# EAGLE board arduino KRI2020 (EAGLE 9.6.2)
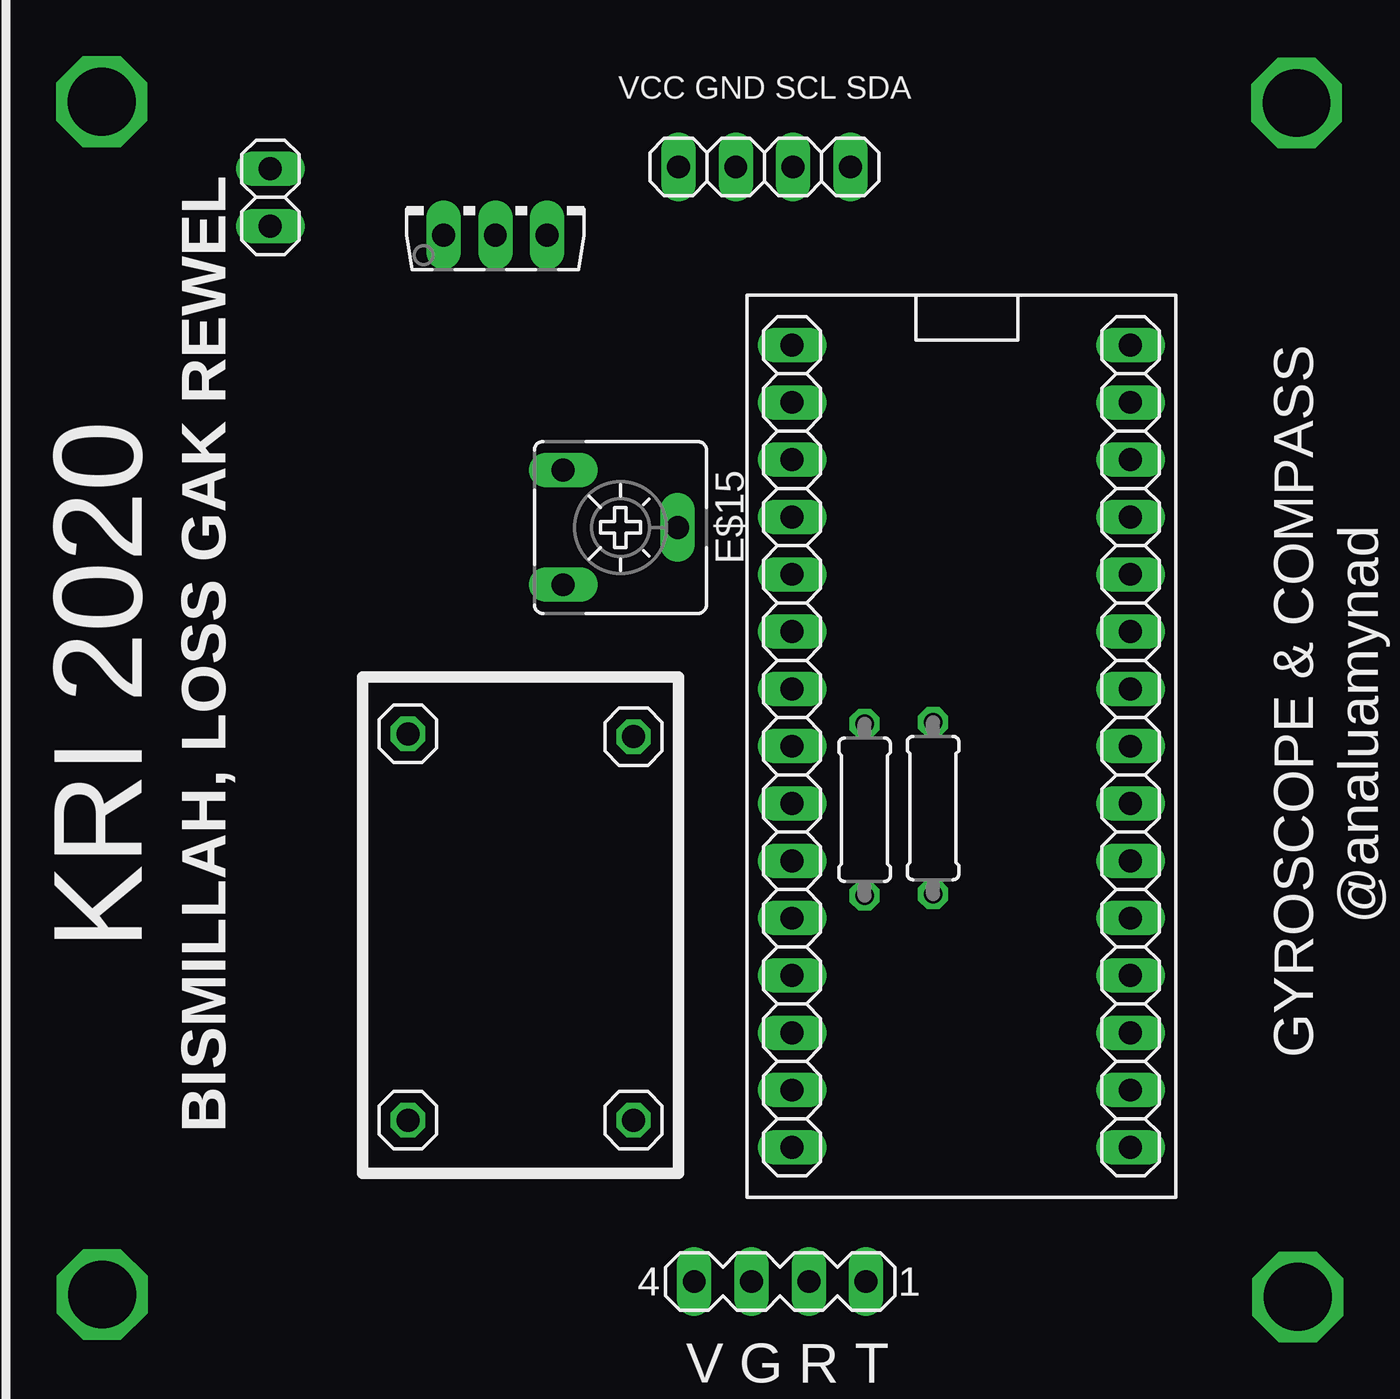
[diagram p0: board, top side]
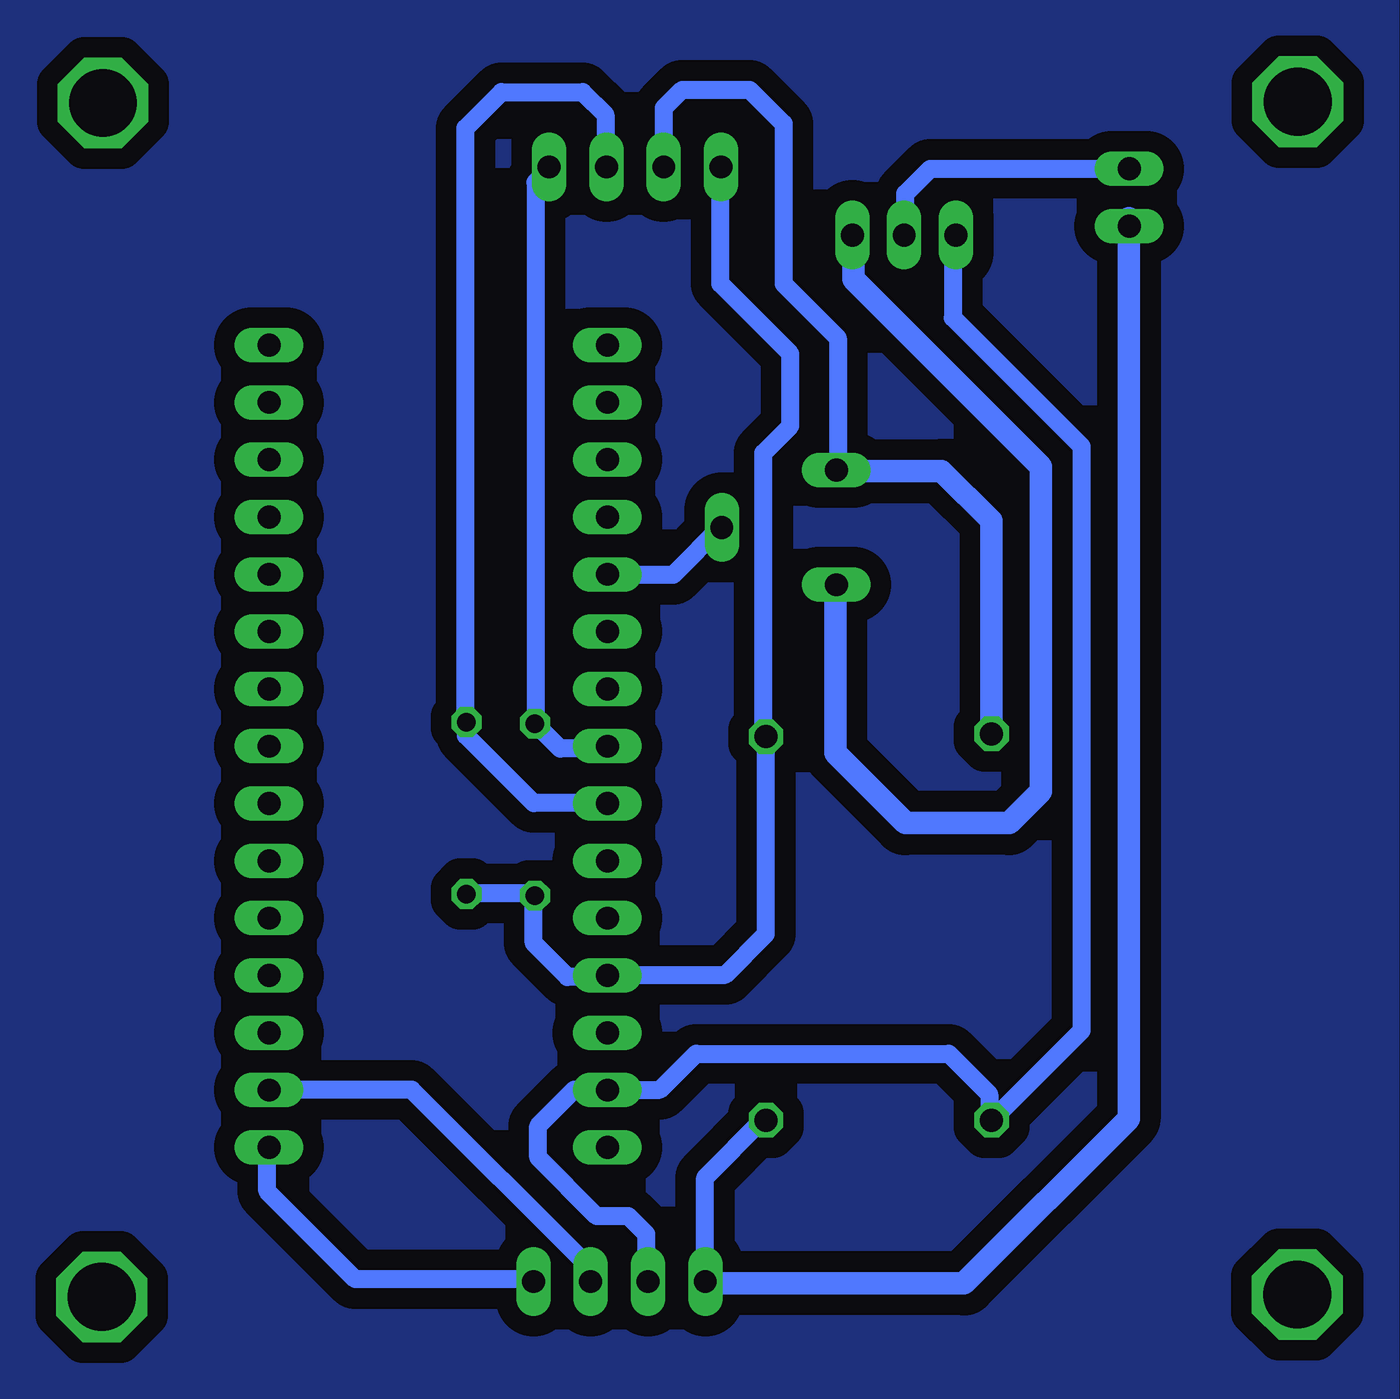
[diagram p1: board, bottom side, seen from below]

No outline drawn. Coordinates in mm, seen from the top.
Copper layers (1*16): Top 0.035mm / dielectric 1.5mm / Bottom 0.035mm
Design rules "default *": minimum track width 6mil, minimum drill 0.35mm, track to track 36mil, track to pad 36mil, pad to pad 36mil, via to via 36mil, smd to smd 6mil, copper to edge 40mil, drill to drill 6mil, minimum pad ring 10mil, minimum via ring 8mil, stop-mask expansion 4mil, vias tented up to drill 0mil, thermal gap 10mil

## Footprints (pad centres in the part's own frame; a part is rotated, then mirrored left to right if it is on the bottom)
1X15 = drill 1.016 long: 1 -17.78,0; 2 -15.24,0; 3 -12.7,0; 4 -10.16,0; 5 -7.62,0; 6 -5.08,0; 7 -2.54,0; 8 0,0; 9 2.54,0; 10 5.08,0; 11 7.62,0; 12 10.16,0; 13 12.7,0; 14 15.24,0; 15 17.78,0
TO126AV = drill 1.016 long: B 2.286,-1.27; C 0,-1.27; E -2.286,-1.27
0207/7 = drill 0.813 octagon: 1 -3.81,0; 2 3.81,0
1X04 = drill 1.016 long: 1 -3.81,0; 2 -1.27,0; 3 1.27,0; 4 3.81,0
MA04-1 = drill 1.016 long: 1 -3.81,0; 2 -1.27,0; 3 1.27,0; 4 3.81,0
1X02 = drill 1.016 long: 1 -1.27,0; 2 1.27,0
1X01 = drill 1.016 octagon: 1 0,0
CA6V = drill 1.016 long: A -2.54,-2.54; E 2.54,-2.54; S 0,2.54

## Placement (x,y rotation side)
E$1  [1X15]  204.6,77.41 270 top
E$2  [1X15]  189.6,77.41 270 top
E$3  [TO126AV]  176.46,101.33 0 top
E$4  [0207/7]  195.85,74.67 90 top
E$5  [1X04]  188.38,103.08 0 top
E$7  [MA04-1]  189.08,53.68 180 top
E$8  [1X02]  166.48,101.73 270 top
E$9  [1X01]  172.58,60.83 180 top
E$10  [1X01]  182.58,60.83 180 top
E$11  [1X01]  182.58,77.83 180 top
E$12  [1X01]  172.58,77.95 180 top
E$13  [0207/7]  192.82,74.59 90 top
E$15  [CA6V]  182,87.1 270 top

## Library data of the parts
E$1 E$2 = adafruit
E$3 = transistor-power
E$4 E$13 = resistor
E$5 E$8-E$12 = Connector
E$7 = con-lstb
E$15 = pot

## Tracks (layer width: path | path; a pad name or v marks a point on that pad's centre or on a via)
PLG
  pour Bottom: 155,111.6 216.9,111.6 216.9,46.5 154.9,46.5 154.9,111.6
S$1  (via drill 3 pad 4)
  other vias: 159.03,53.11
S$2  (via drill 3 pad 4)
  other vias: 212.02,53
S$3  (via drill 3 pad 4)
  other vias: 159.01,105.97
S$4  (via drill 3 pad 4)
  other vias: 211.96,105.92
S$5
  Bottom 0.8: 176.4,100.1 176.4,101.9 175.3,103 166.4,103
S$6
  Bottom 0.8: 185.28,53.68 185.28,58.28 182.68,60.88
S$7
  Bottom 0.8: 189.58,74.88 192.88,74.88 195.88,77.88
S$8
  Bottom 1: 166.5,100.8 166.5,60.9 173.8,53.6 185.3,53.6
S$9
  Bottom 1: 178.7,100.1 178.7,98.1 170.4,89.8 170.4,75.4 171.8,74 176.4,74 179.5,77.1 179.5,84.6
S$11
  Bottom 0.8: 189.9,77.3 191.7,77.3 192.8,78.4 192.8,102.4 192.3,102.9
S$12
  Bottom 0.8: 189.18,67.28 184.38,67.28 182.58,69.08 182.58,78.08 182.68,78.18
S$13
  Bottom 0.8: 187.88,53.68 187.88,55.78 188.68,56.58 190.08,56.58 192.68,59.18 192.68,60.58 191.08,62.18 187.28,62.18 185.68,63.78 174.48,63.78 172.68,61.98 172.68,60.88
S$14
  Bottom 0.8: 187.1,103.2 187.1,105.7 186.3,106.5 183.3,106.5 181.8,105 181.8,97.9 179.4,95.5 179.4,89.6
  Bottom 1: 179.4,89.6 174.8,89.6 172.6,87.4 172.6,77.9
S$15
  Bottom 0.8: 182.7,78 182.7,90.4 181.5,91.6 181.5,94.8 184.6,97.9 184.6,103
S$16
  Bottom 0.8: 184.5,87.2 186.7,85 189.7,85
S$17
  Bottom 0.8: 193.18,70.88 195.88,70.88
S$18
  Bottom 0.8: 189.98,67.18 191.38,67.18 192.88,68.68 192.88,70.68
S$19
  Bottom 0.8: 174.3,100.1 174.3,96.4 168.6,90.7 168.6,64.8 172.6,60.8
S$20
  Bottom 0.8: 192.88,53.78 200.78,53.78 204.68,57.68 204.68,59.68
S$21
  Bottom 0.8: 190.38,53.78 190.38,54.28 198.28,62.18 204.48,62.18
S$22
  Bottom 0.8: 195.9,78.3 195.9,104.8 194.3,106.4 190.7,106.4 189.7,105.4 189.7,103

## Text on the board
tPlace: VCC GND SCL SDA | @analuamynad | KRI 2020 | GYROSCOPE & COMPASS | BISMILLAH, LOSS GAK REWEL | V G R T